# EAGLE board soccerbotsqr (EAGLE 8.2.2)
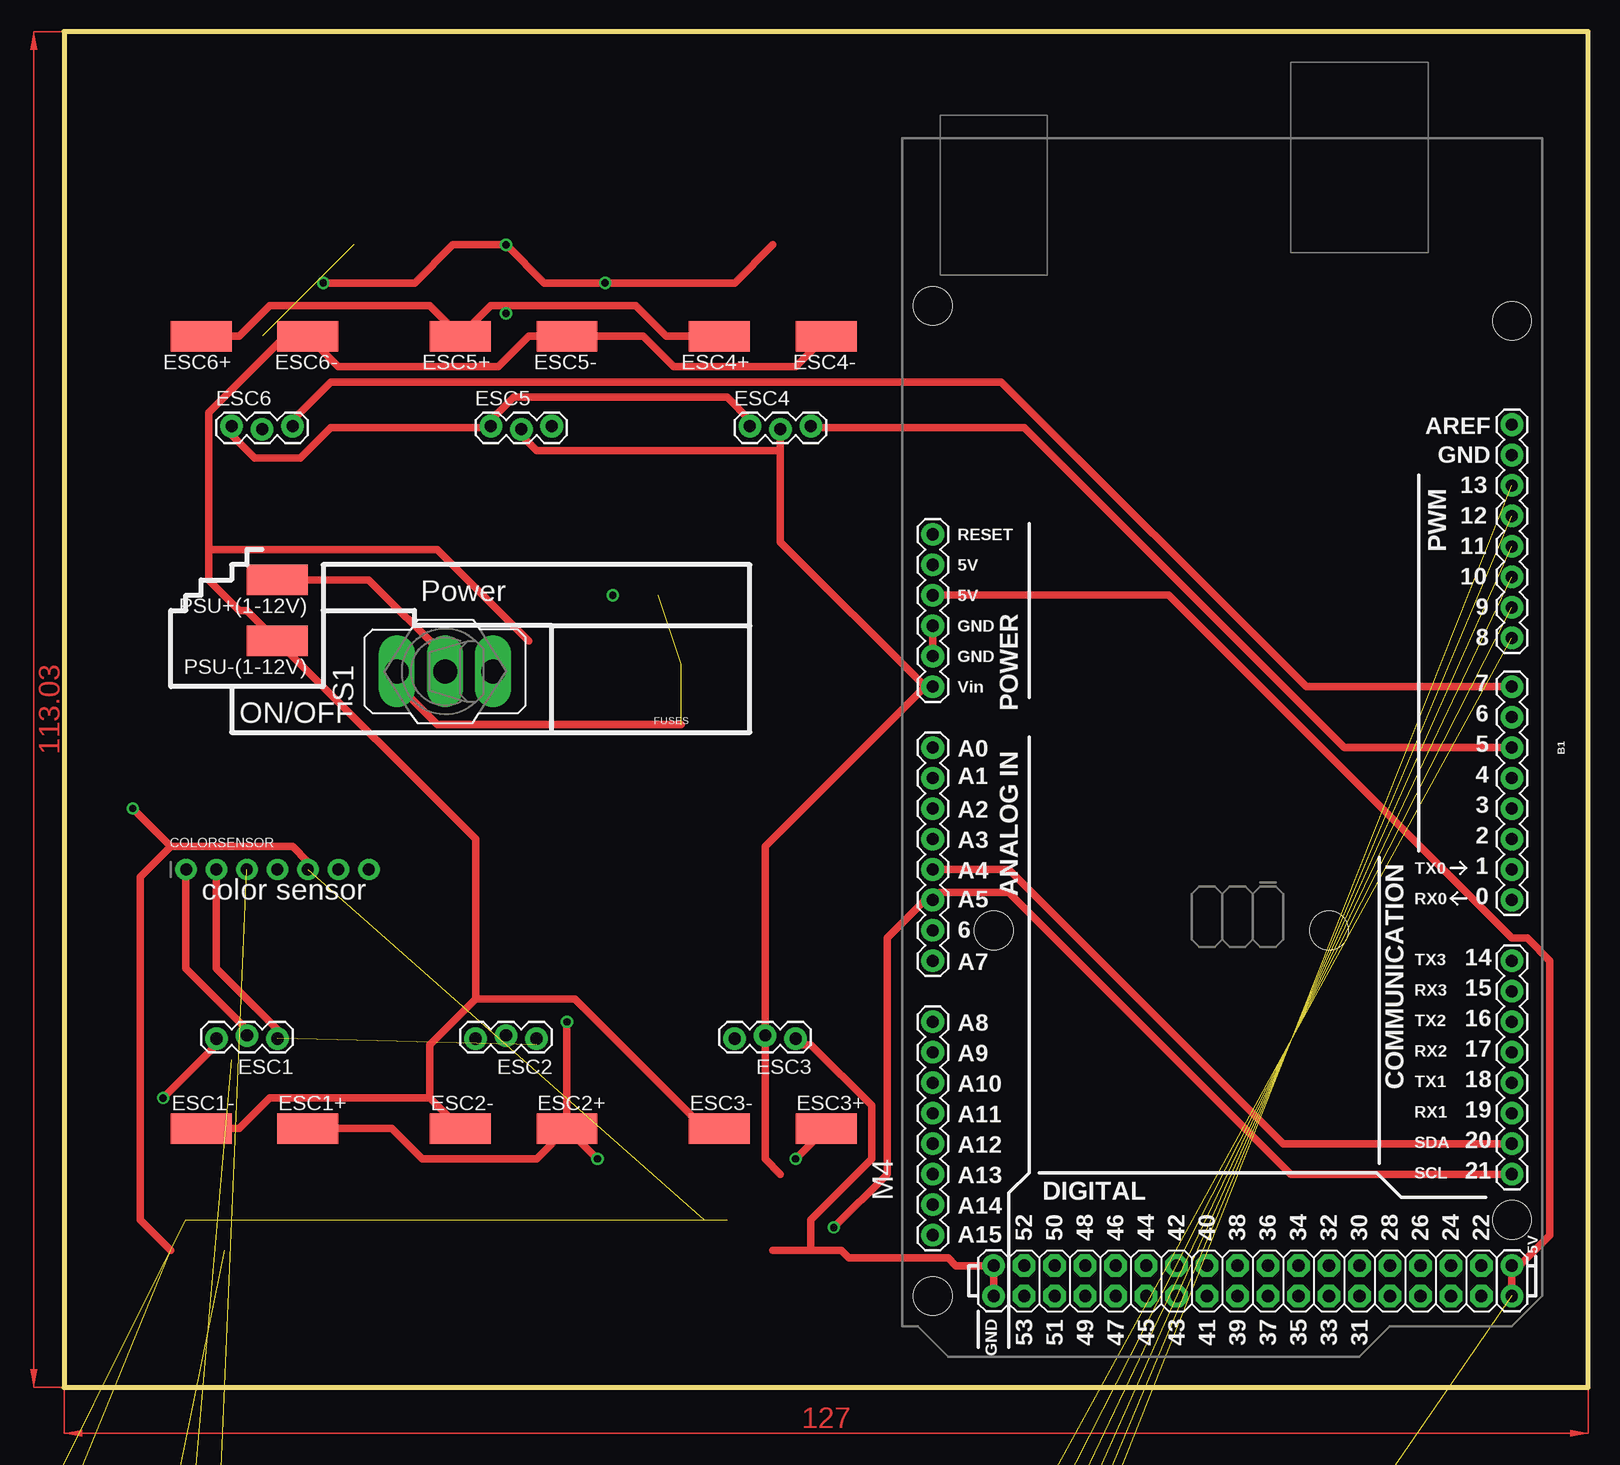
[diagram p0: board, top side]
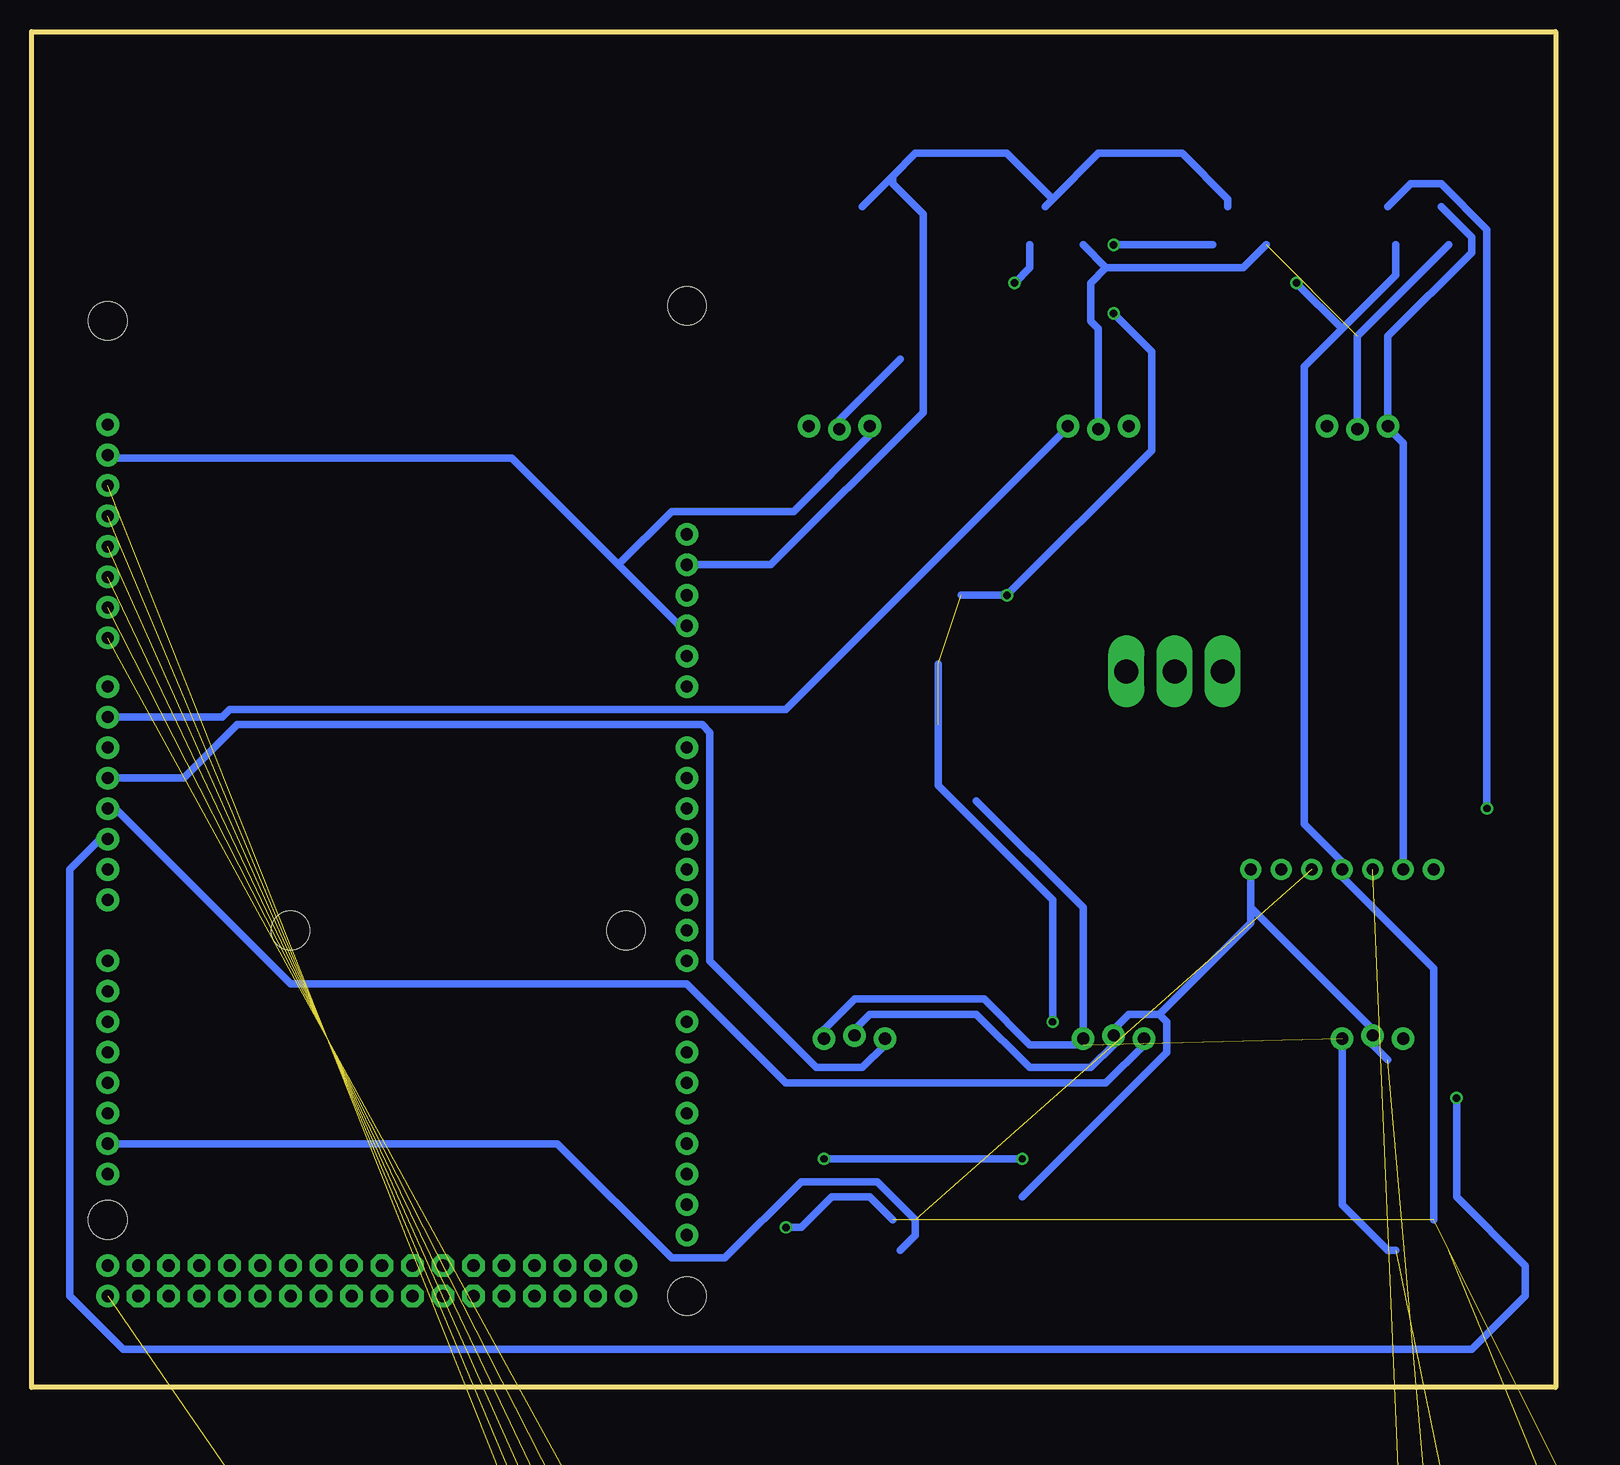
[diagram p1: board, bottom side, seen from below]

Size 127 x 113.03 mm. Coordinates in mm from the lower left corner, seen from the top.
Outline: 0,113.03 0,0 127,0 127,113.03 0,113.03
Copper layers (1*16): Top 0.035mm / dielectric 1.5mm / Bottom 0.035mm
Design rules "default *": minimum track width 25mil, minimum drill 24mil, track to track 25mil, track to pad 25mil, pad to pad 25mil, via to via 25mil, smd to smd 25mil, copper to edge 40mil, drill to drill 8mil, minimum pad ring 10mil, minimum via ring 8mil, stop-mask expansion 4mil, vias tented up to drill 0mil, thermal gap 10mil

## Footprints (pad centres in the part's own frame; a part is rotated, then mirrored left to right if it is on the bottom)
ARDUINO_MEGA = drill 1.016 pad 1.88: 0 13.97,24.13; 1 11.43,24.13; 2 8.89,24.13; 3 6.35,24.13; 3.3V -13.97,-24.13; 4 3.81,24.13; 5 1.27,24.13; 5V@0 -11.43,-24.13; 5V@1 44.45,24.13; 5V@2 46.99,24.13; 6 -1.27,24.13; 7 -3.81,24.13; 8 -7.874,24.13; 9 -10.414,24.13; 10 -12.954,24.13; 11 -15.494,24.13; 12 -18.034,24.13; 13 -20.574,24.13; 14 19.05,24.13; 15 21.59,24.13; 16 24.13,24.13; 17 26.67,24.13; 18 29.21,24.13; 19 31.75,24.13; 20 34.29,24.13; 21 36.83,24.13; A0 1.27,-24.13; A1 3.81,-24.13; A2 6.35,-24.13; A3 8.89,-24.13; A4 11.43,-24.13; A5 13.97,-24.13; A6 16.51,-24.13; A7 19.05,-24.13; A8 24.13,-24.13; A9 26.67,-24.13; A10 29.21,-24.13; A11 31.75,-24.13; A12 34.29,-24.13; A13 36.83,-24.13; A14 39.37,-24.13; A15 41.91,-24.13; AREF -25.654,24.13; GND@0 -8.89,-24.13; GND@1 -6.35,-24.13; GND@2 44.45,-19.05; GND@3 46.99,-19.05; GND@4 -23.114,24.13; RESET -16.51,-24.13; VIN -3.81,-24.13 | drill 1.016 pad 1.88 octagon: 22 44.45,21.59; 23 46.99,21.59; 24 44.45,19.05; 25 46.99,19.05; 26 44.45,16.51; 27 46.99,16.51; 28 44.45,13.97; 29 46.99,13.97; 30 44.45,11.43; 31 46.99,11.43; 32 44.45,8.89; 33 46.99,8.89; 34 44.45,6.35; 35 46.99,6.35; 36 44.45,3.81; 37 46.99,3.81; 38 44.45,1.27; 39 46.99,1.27; 40 44.45,-1.27; 41 46.99,-1.27; 42 44.45,-3.81; 43 46.99,-3.81; 44 44.45,-6.35; 45 46.99,-6.35; 46 44.45,-8.89; 47 46.99,-8.89; 48 44.45,-11.43; 49 46.99,-11.43; 50 44.45,-13.97; 51 46.99,-13.97; 52 44.45,-16.51; 53 46.99,-16.51 | hole 3.2: -34.29,24.13; -35.56,-24.13; 16.51,8.89; 16.51,-19.05; 40.64,24.13; 46.99,-24.13
1X07_ROUND_70 = drill 1 pad 1.778: 1 -7.62,0; 2 -5.08,0; 3 -2.54,0; 4 0,0; 5 2.54,0; 6 5.08,0; 7 7.62,0
1X03_LOCK = drill 1.016 pad 1.88: 1 0,0.127; 2 2.54,-0.127; 3 5.08,0.127
SMD2,54-5,08 = smd 2.54 x 5.08: 1 0,0
1X08_ROUND_76 = drill 1 pad 1.93: 1 -8.89,0; 2 -6.35,0; 3 -3.81,0; 4 -1.27,0; 5 1.27,0; 6 3.81,0; 7 6.35,0; 8 8.89,0
1X03 = drill 1.016: 1 -2.54,0; 2 0,0; 3 2.54,0
320-916 = drill 2.007 long: 1 0,4.013; 2 0,0; 3 0,-4.013

## Placement (x,y rotation side)
B1  ARDUINO_MEGA_R3FULL  [ARDUINO_MEGA]  96.52,54.61 270 top
COLORSENSOR  [1X07_ROUND_70]  17.78,43.18 0 top
ESC1  [1X03_LOCK]  17.78,29.21 180 top
ESC1+  [SMD2,54-5,08]  20.32,21.59 270 top
ESC1-  [SMD2,54-5,08]  11.43,21.59 270 top
ESC2  [1X03_LOCK]  39.37,29.21 180 top
ESC2+  [SMD2,54-5,08]  41.91,21.59 270 top
ESC2-  [SMD2,54-5,08]  33.02,21.59 270 top
ESC3  [1X03_LOCK]  60.96,29.21 180 top
ESC3+  [SMD2,54-5,08]  63.5,21.59 270 top
ESC3-  [SMD2,54-5,08]  54.61,21.59 270 top
ESC4  [1X03_LOCK]  57.15,80.01 0 top
ESC4+  [SMD2,54-5,08]  54.61,87.63 90 top
ESC4-  [SMD2,54-5,08]  63.5,87.63 90 top
ESC5  [1X03_LOCK]  35.56,80.01 0 top
ESC5+  [SMD2,54-5,08]  33.02,87.63 90 top
ESC5-  [SMD2,54-5,08]  41.91,87.63 90 top
ESC6  [1X03_LOCK]  13.97,80.01 0 top
ESC6+  [SMD2,54-5,08]  11.43,87.63 90 top
ESC6-  [SMD2,54-5,08]  20.32,87.63 90 top
IMU  [1X08_ROUND_76]  3.81,-16.51 0 top  (outside the outline)
IR1  [1X03]  -5.08,-247.65 0 top  (outside the outline)
IR2  [1X03]  -5.08,-232.41 0 top  (outside the outline)
IR3  [1X03]  -5.08,-217.17 0 top  (outside the outline)
IR4  [1X03]  -5.08,-201.93 0 top  (outside the outline)
IR5  [1X03]  -5.08,-186.69 0 top  (outside the outline)
IR6  [1X03]  -5.08,-171.45 0 top  (outside the outline)
PSU+(1-12V)  [SMD2,54-5,08]  17.78,67.31 90 top
PSU-(1-12V)  [SMD2,54-5,08]  17.78,62.23 90 top
S1  [320-916]  31.75,59.69 90 top

## Library data of the parts
B1 = SparkFun-Boards; OC_NEWARK: unknown
COLORSENSOR = microbuilder; OC_NEWARK: unknown
ESC1-ESC6 = SparkFun; MF: MOLEX; MPN: 22-11-2032; OC_NEWARK: 81C8218
ESC1+ ESC1- ESC2+ ESC2- ESC3+ ESC3- ESC4+ ESC4- ESC5+ ESC5- ESC6+ ESC6- PSU+(1-12V) PSU-(1-12V) = wirepad; OC_NEWARK: unknown
IMU = microbuilder
IR1-IR6 = adafruit
S1 = switch; MPN: 5636A9; OC_NEWARK: 13M4539

## Nets
3.3V: B1.3.3V
5.5V: B1.5V@0 B1.5V@1 B1.5V@2 IR1.3 IR2.3 IR3.3 IR4.3 IR5.3 IR6.3
+3V3: COLORSENSOR.3 IMU.8
A0: B1.A0
A1: B1.A1
A2: B1.A2
A3: B1.A3
A6: B1.A6
A7: B1.A7
A8: B1.A8
A9: B1.A9
A10: B1.A10
A11: B1.A11
A12: B1.A12
A13: B1.A13
A14: B1.A14
A15: B1.A15
AREF: B1.AREF
BAT+: ESC1+.1 ESC2+.1 ESC3+.1 ESC4+.1 ESC5+.1 ESC6+.1 S1.1
BAT-: ESC1-.1 ESC2-.1 ESC3-.1 ESC4-.1 ESC5-.1 ESC6-.1 PSU-(1-12V).1
D0: B1.0
D1: B1.1
D2: B1.2 ESC1.3
D3: B1.3 ESC2.3
D4: B1.4 ESC3.3
D5: B1.5 ESC4.3
D6: B1.6 ESC5.3
D7: B1.7 ESC6.3
D8: B1.8 IR6.1
D9: B1.9 IR5.1
D10: B1.10 IR4.1
D11: B1.11 IR3.1
D12: B1.12 IR2.1
D13: B1.13 IR1.1
D14: B1.14
D15: B1.15
D16: B1.16
D17: B1.17
D18: B1.18
D19: B1.19
D22: B1.22
D23: B1.23
D24: B1.24
D25: B1.25
D26: B1.26
D27: B1.27
D28: B1.28
D29: B1.29
D30: B1.30
D31: B1.31
D32: B1.32
D33: B1.33
D34: B1.34
D35: B1.35
D36: B1.36
D37: B1.37
D38: B1.38
D39: B1.39
D40: B1.40
D41: B1.41
D42: B1.42
D43: B1.43
D44: B1.44
D45: B1.45
D46: B1.46
D47: B1.47
D48: B1.48
D49: B1.49
D50: B1.50
D51: B1.51
D52: B1.52
D53: B1.53
DRDY: IMU.5
GND: B1.GND@0 B1.GND@1 B1.GND@2 B1.GND@3 B1.GND@4 COLORSENSOR.2 ESC1.1 ESC2.1 ESC3.1 ESC4.1 ESC5.1 ESC6.1 IMU.6 IR1.2 IR2.2 IR3.2 IR4.2 IR5.2 IR6.2
INT: COLORSENSOR.6
INT1: IMU.4
INT2: IMU.3
N$4: PSU+(1-12V).1 S1.2
RESET: B1.RESET
SCL: B1.21 B1.A5 COLORSENSOR.4 IMU.1
SDA: B1.20 B1.A4 COLORSENSOR.5 IMU.2
VIN: B1.VIN COLORSENSOR.1 COLORSENSOR.7 ESC1.2 ESC2.2 ESC3.2 ESC4.2 ESC5.2 ESC6.2 IMU.7

## Tracks (layer width: path | path; a pad name or v marks a point on that pad's centre or on a via)
3.3V
  Bottom 0.635: 41.91,99.06 38.1,102.87 31.11,102.87 27.3,99.06 27.3,98.42 | 41.91,99.06 42.55,98.42 | 55.25,100.97 53.34,102.87 45.72,102.87 41.91,99.06 | 55.25,100.97 57.78,98.42 | B1.3.3V 65.41,68.58 52.7,81.28 52.7,97.79 55.25,100.33 55.25,100.97
5.5V  (6 unrouted)
  Top 0.635: 120.65,9.53 B1.5V@2 | B1.5V@0 92.08,66.04 120.65,37.46 121.92,37.46 123.82,35.56 123.82,12.7 120.65,9.53 | 120.65,9.53 B1.5V@1
+3V3  (1 unrouted)
BAT+  (via drill 0.61)  (2 unrouted)
  Top 0.635: ESC1+.1 27.3,21.59 29.84,19.05 39.37,19.05 ESC2+.1 | v60.96,19.05 ESC3+.1 | ESC2+.1 v44.45,19.05 | ESC6+.1 14.6,87.63 17.14,90.17 30.48,90.17 ESC5+.1 35.56,90.17 36.83,90.17 | ESC4+.1 50.16,87.63 47.62,90.17 36.83,90.17 | 36.83,90.17 v36.83,89.53 | v41.91,30.48 ESC2+.1 | 51.44,55.24 31.11,55.24 27.94,58.42 27.94,59.69 S1.1
  Bottom 0.635: v44.45,19.05 v60.96,19.05 | 49.53,66.04 v45.72,66.04 33.66,78.11 33.66,86.36 v36.83,89.53 | v41.91,30.48 41.91,40.64 51.44,50.16 51.44,60.33
BAT-
  Top 0.635: ESC1-.1 14.6,21.59 17.14,24.13 30.48,24.13 | ESC2-.1 30.48,24.13 | ESC3-.1 53.34,21.59 42.55,32.38 34.29,32.38 | 34.29,32.38 30.48,28.57 30.48,24.13 | ESC4-.1 60.96,85.09 50.8,85.09 48.26,87.63 ESC5-.1 38.73,87.63 36.19,85.09 22.86,85.09 ESC6-.1 18.41,87.63 12.06,81.28 12.06,69.85 | 12.06,69.85 12.06,67.31 14.6,64.77 15.24,64.77 PSU-(1-12V).1 34.29,45.72 34.29,32.38 | 38.73,62.23 31.11,69.85 12.06,69.85
D2  (via drill 0.61)
  Top 0.635: v8.25,24.13 12.7,28.57 ESC1.3
  Bottom 0.635: v8.25,24.13 8.25,15.87 2.54,10.16 2.54,7.62 6.98,3.18 119.38,3.18 123.82,7.62 123.82,43.18 121.28,45.72 B1.2
D3
  Bottom 0.635: B1.3 120.01,48.26 105.41,33.66 72.39,33.66 64.13,25.4 37.47,25.4 34.29,28.57 ESC2.3
D4
  Bottom 0.635: B1.4 114.3,50.8 109.85,55.24 71.12,55.24 70.48,54.61 70.48,35.56 61.59,26.67 57.78,26.67 55.88,28.57 ESC3.3
D5
  Top 0.635: B1.5 106.68,53.34 80.01,80.01 62.23,80.01 ESC4.3
D6
  Bottom 0.635: B1.6 111.12,55.88 110.49,56.52 64.13,56.52 40.64,80.01 ESC5.3
D7
  Top 0.635: B1.7 103.5,58.42 78.11,83.82 22.22,83.82 19.05,80.64 ESC6.3
D8  (1 unrouted)
D9  (1 unrouted)
D10  (1 unrouted)
D11  (1 unrouted)
D12  (1 unrouted)
D13  (1 unrouted)
GND  (8 unrouted)
  Top 0.635: B1.GND@3 B1.GND@2 74.3,10.16 73.66,10.79 65.41,10.79 64.77,11.43 62.23,11.43 | 59.05,11.43 62.23,11.43 | COLORSENSOR.2 12.7,34.92 17.78,29.85 ESC1.1 | 62.23,11.43 62.23,13.97 67.31,19.05 67.31,23.5 62.23,28.57 60.96,28.57 ESC3.1 | ESC4.1 57.15,80.64 55.25,82.55 37.47,82.55 35.56,80.64 ESC5.1 35.56,80.01 22.22,80.01 19.68,77.47 15.88,77.47 13.97,79.38 ESC6.1 | B1.GND@0 B1.GND@1
  Bottom 0.635: ESC3.1 60.96,29.85 58.42,32.38 47.62,32.38 43.81,28.57 39.37,28.57 ESC2.1 39.37,40 48.26,48.89 | 13.34,11.43 13.97,11.43 17.78,15.24 ESC1.1 | 9.52,98.42 6.98,95.88 6.98,94.61 13.97,87.63 ESC6.1 13.97,80.01 12.7,78.74 COLORSENSOR.2 | 78.11,68.58 73.02,63.5 B1.GND@0 | 78.11,68.58 87,77.47 120.65,77.47 B1.GND@4 | ESC4.1 57.15,79.38 63.5,73.02 73.66,73.02 78.11,68.58
N$4
  Top 0.635: PSU+(1-12V).1 25.4,67.31 31.75,60.96 S1.2
SCL  (via drill 0.61)  (2 unrouted)
  Top 0.635: B1.21 102.23,17.78 78.74,41.27 73.02,41.27 B1.A5 71.75,40.64 68.58,37.46 68.58,17.78 v64.13,13.33 | 59.05,95.25 55.88,92.08 v45.08,92.08 40,92.08 v36.83,95.25 32.38,95.25 29.21,92.08 v21.59,92.08
  Bottom 0.635: v36.83,95.25 28.58,95.25 | 43.81,95.25 43.81,93.34 v45.08,92.08 | 10.16,13.97 10.16,34.92 17.78,42.54 COLORSENSOR.4 17.78,43.81 20.95,46.99 20.95,85.09 17.78,88.27 | 13.34,95.25 13.34,92.71 17.78,88.27 | 17.78,88.27 v21.59,92.08 | v64.13,13.33 62.86,13.33 60.33,15.87 57.15,15.87 55.25,13.97
SDA  (via drill 0.61)  (2 unrouted)
  Top 0.635: B1.20 101.6,20.32 78.74,43.18 B1.A4 | COLORSENSOR.5 20.32,43.81 19.05,45.09 8.89,45.09 | 8.89,45.09 6.35,42.54 6.35,13.97 8.89,11.43 | 8.89,45.09 v5.71,48.26
  Bottom 0.635: 13.97,98.42 12.06,100.33 9.52,100.33 5.71,96.52 v5.71,48.26 | B1.20 83.19,20.32 73.66,10.79 69.22,10.79 62.86,17.14 56.52,17.14 53.34,13.97 53.34,12.7 54.61,11.43
VIN  (2 unrouted)
  Top 0.635: COLORSENSOR.1 10.16,34.92 15.24,29.85 ESC1.2 | 59.69,17.78 58.42,19.05 ESC3.2 58.42,45.09 71.75,58.42 | 71.75,58.42 59.69,70.48 59.69,78.11 | ESC4.2 59.69,78.11 | 59.69,78.11 39.37,78.11 38.1,79.38 ESC5.2 | 71.75,58.42 B1.VIN
  Bottom 0.635: 13.97,27.3 15.24,28.57 ESC1.2 15.24,29.85 25.4,40 | 44.45,15.87 32.38,27.94 32.38,30.48 33.02,31.11 | 33.02,31.11 35.56,31.11 36.83,29.85 ESC2.2 36.83,28.57 38.73,26.67 43.81,26.67 48.26,31.11 57.15,31.11 58.42,29.85 ESC3.2 | 25.4,40 25.4,38.73 33.02,31.11 | 25.4,40 COLORSENSOR.7 | 8.89,95.25 16.51,87.63 ESC6.2 | 24.13,95.25 26.03,93.34 37.47,93.34 | 39.37,95.25 37.47,93.34 | ESC5.2 38.1,88.27 38.73,88.9 38.73,92.08 37.47,93.34 | 54.61,85.72 59.69,80.64 ESC4.2
(copper drawn outside any net)
  shapes: Top area x2

## Text on the board
tNames: Power | ON/OFF | FUSES | color sensor | M4
tValues: D7 | D6 | D5 | + | - | PWM | + | - | PWM | + | - | PWM | VIN | GND | 3V3 | SCL | SDA | INT | VIN | PWM | - | + | PWM | - | + | PWM | - | + | D2 | D3 | D4